# Altium PCB sathira.PcbDoc
Units mm, origin at the board's own origin, x right, y up, seen from the top; angles counter-clockwise.
Board outline 91.31 x 78.36 mm, 2 copper layers (Top Layer, Bottom Layer); 16 components, 19 nets, 55 pads, 0 vias.
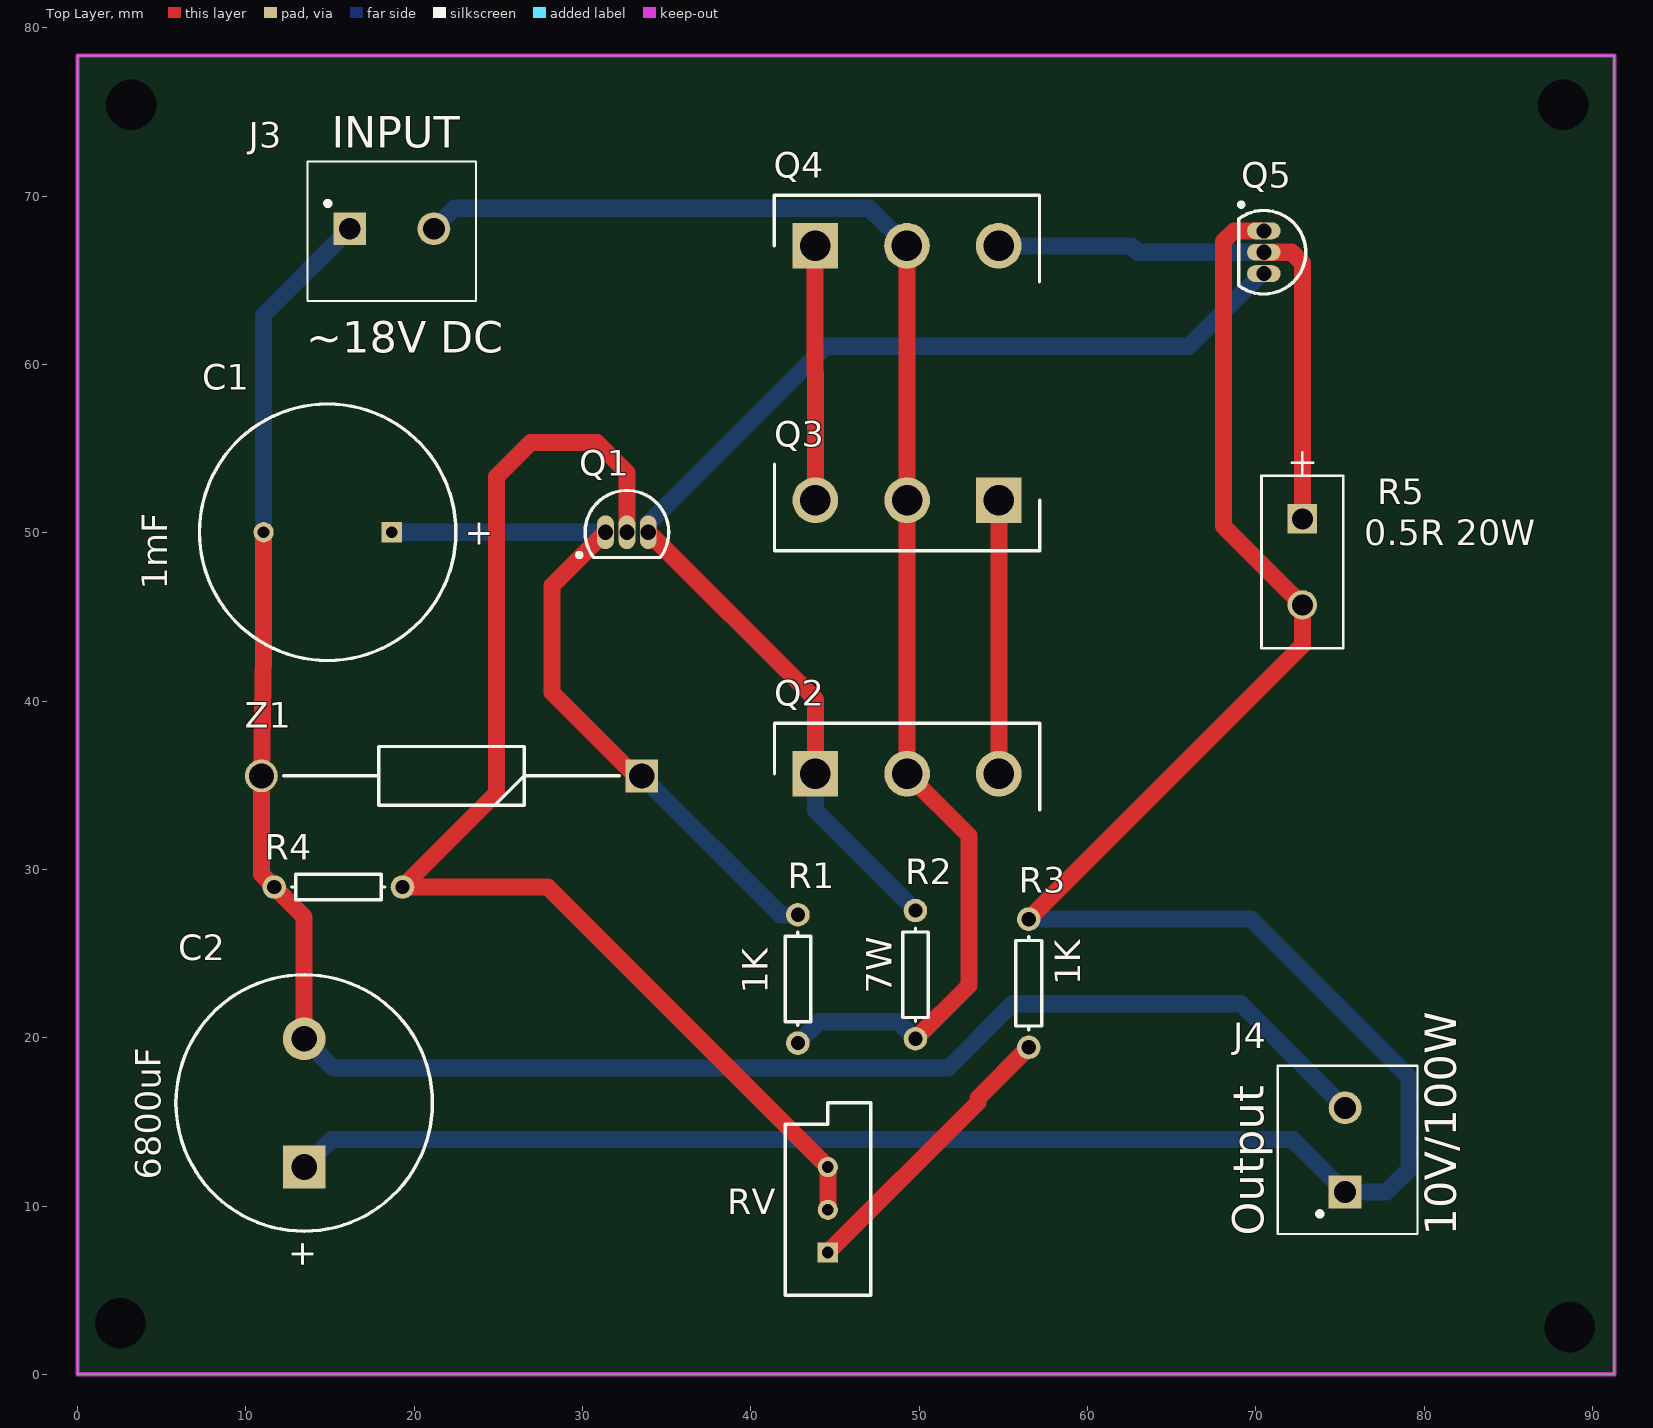
[diagram p0: Top Layer view]
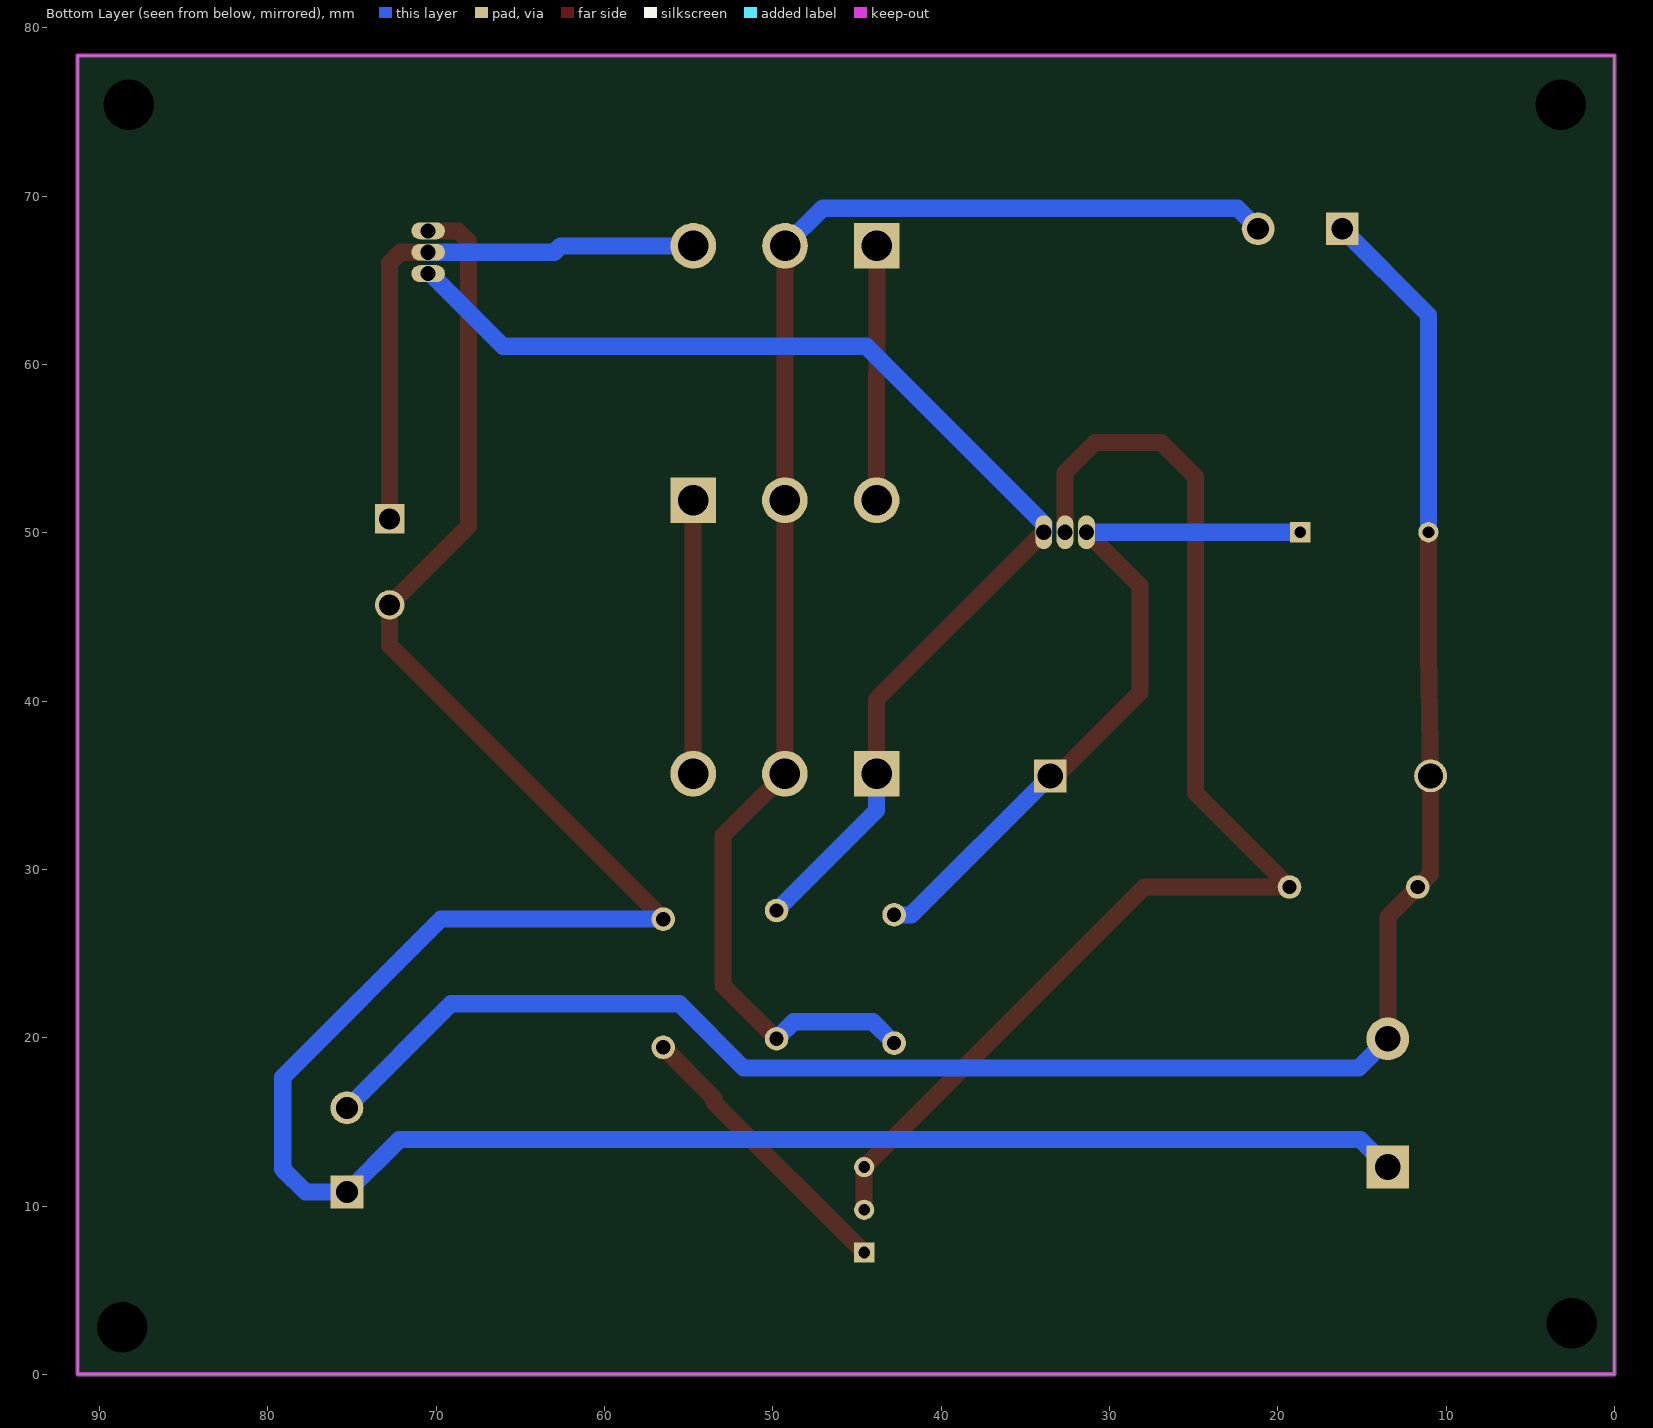
[diagram p1: Bottom Layer view, seen from below]

## Layer stack, top to bottom
Top Solder: solder mask 0.0102, Solder Resist, Dk 3.5
Top Layer: signal copper 0.0356
Dielectric 1: dielectric 0.32, FR-4, Dk 4.8
Bottom Layer: signal copper 0.0356
Bottom Solder: solder mask 0.0102, Solder Resist, Dk 3.5

## Board outline
0,0 91.313,0 91.313,78.359 0,78.359

## Design rules (kind name [scope] priority, off if disabled: settings)
Clearance [All] p1: gap=0.254 ignorepadtopadclearanceinfootprint=TRUE except(0.635: Fill-Fill Fill-Poly Fill-Region Poly-Poly Poly-Region Region-Region)
PolygonConnect [All] p1: connectstyle=Relief reliefconductorwidth=0.254 reliefentries=4 polygonreliefangle="90 Angle" airgapwidth=0.254
RoutingVias [All] p1: holewidth=0.711 width=1.27 viastyle="Through Hole" minholewidth=0.711 minwidth=1.27 maxholewidth=0.711 maxwidth=1.27
SolderMaskExpansion [All] p1: expansion=0.102
Width [All] p1: maxlimit=1.524 minlimit=0.762 preferedwidth=1.016
30 further rules are at their usual default settings.

## Classes and differential pairs
component class Sheet1new: C1 C2 J3 J4 Q1 Q2 Q3 Q4 R1 R2 R3 R4 R5 RV Z1

## Components (designator, comment, footprint, x,y, rotation, side; value= is the part's Value field where it differs from the comment)
C1 "Cap Pol1" RB7.6-15 14.859,50.038 r0 top value=100pF
C2 "Cap Pol1" RB7.6-15 13.462,16.129 r270 top value=100pF
J3 "1935161" *PHOENIX_1935161 18.669,68.072 r0 top
J4 "1935161" *PHOENIX_1935161 75.311,13.335 r90 top
Q1 "2N3904" TO-92A 32.639,50.038 r270 top
Q2 "TIP3055" TO545P515X1560X2445-3P 43.837,35.687 r0 top
Q3 "TIP3055" TO545P515X1560X2445-3P 54.737,51.943 r180 top
Q4 "TIP3055" TO545P515X1560X2445-3P 43.826,67.056 r0 top
Q5 "2N3904" TO-92A 70.485,66.675 r180 top
R1 "Res1" AXIAL-0.3 42.799,23.495 r270 top value=100
R2 "Res1" AXIAL-0.3 49.784,23.749 r270 top value=1K
R3 "Res1" AXIAL-0.3 56.515,23.241 r90 top value=1K
R4 "Res1" AXIAL-0.3 15.494,28.956 r0 top value=1K
R5 "TK20PR050JE" RES_TK 72.771,45.72 r270 top value=0.5
RV "RPot" VR5 44.577,9.779 r90 top value=1K
Z1 "1N5338BG" DIOAD2260W109L864D349 33.522,35.56 r180 top

## Footprints (in the part's own frame and the unit in brackets; to place one, negate y for a bottom-side part, rotate by r counter-clockwise, add the part's x,y. Pads: shape width x height; smd on the part's side, far side on the other; paste and mask are expansions set on the pad)
*PHOENIX_1935161 [mm]
  rect 1.95x1.95 hole 1.3: 1(-2.5,0)
  round 1.95 hole 1.3: 2(2.5,0)
  silkscreen extent -5,-4.3 5,4
AXIAL-0.3 [mm] "Axial Device, Thru-Hole; 2 Leads; 0.3 in Pin Spacing"
  round 1.4 hole 0.85: 1(-3.81,0) 2(3.81,0)
  silkscreen extent -2.77,-0.76 2.77,0.76
DIOAD2260W109L864D349 [mm]
  rect 1.95x1.95 hole 1.5: 1(0,0)
  round 1.95 hole 1.5: 2(22.6,0)
  silkscreen extent 1.33,-1.74 21.27,1.74, body extent -0.54,-1.84 23.14,1.84, height 3.68
RB7.6-15 [mm] "Polarized Capacitor (Radial); 2 Leads"
  rect 1.2x1.2 hole 0.7: 1(3.81,0)
  round 1.2 hole 0.7: 2(-3.81,0)
  silkscreen extent -7.62,-7.62 7.62,7.62
RES_TK [mil]
  rect 69x69 hole 49 mask-1000: 1(-201,0)
  round 69 hole 49 mask-1000: 2(0,0)
  silkscreen extent -358,-96 102,96
TO545P515X1560X2445-3P [mm]
  rect 2.715x2.715 hole 1.81: 1(0,0)
  round 2.715 hole 1.81: 2(5.45,0) 3(10.9,0)
  silkscreen extent -2.43,-2.15 13.33,3, body extent -2.35,-2.15 13.25,3, height 24
TO-92A [mm] "TO, Flat Index; 3 In-Line, Axial Leads; Body Dia. 4.5mm; Leads 0.51 x 0.48 mm (max)"
  oval 2x1 hole 0.9: 1(0,-1.27) 2(0,0) 3(0,1.27)
  silkscreen extent -2.48,-2.95 1.5,2.48, body extent -2.48,-2.5 1.5,2.5, height 6.86
VR5 [mm] "Thru-Hole; 3 Leads"
  rect 1.2x1.2 hole 0.7: 1(-2.54,0)
  round 1.2 hole 0.7: 2(0,0) 3(2.54,0)
  silkscreen extent -5.08,-2.54 6.35,2.54

## Part data
C1 C2: "Polarized Capacitor (Radial)", LatestRevisionDate=17-Jul-2002, LatestRevisionNote="Re-released for DXP Platform.", PackageDescription="Polarized Capacitor (Radial); 2 Leads", PackageReference=RB7.6-15, Published=8-Jun-2000, Publisher="Altium Limited"
J3 J4: "Conn Terminal Blocks 2 POS 5mm Solder ST Thru-Hole 16A", Package=None, Availability=Unavailable, MF="Phoenix Contact", MP=1935161, Price=None, SnapEDA_Link=https://www.snapeda.com/parts/1935161/Phoenix%20Contact/view-part/?ref=snap
Q1 Q5: "NPN General Purpose Amplifier", ComponentLink1Description="Manufacturer Link", ComponentLink1URL=http://www.fairchildsemi.com/, ComponentLink2Description=Datasheet, ComponentLink2URL=http://www.fairchildsemi.com/ds/2N%2F2N3904.pdf, DatasheetVersion=1997, LatestRevisionDate=15-Jan-2003, LatestRevisionNote="PCB Footprint 'BCY-W3/D4.7' replaced", PackageDescription="TO, Flat Index; 3 In-Line, Axial Leads; Body Dia. 4.5mm; Leads 0.51 x 0.48 mm (max)", PackageReference=TO-92A, PackageVersion=Sep-1998, Published=8-Jun-2000, Publisher="Altium Limited"
Q2 Q3 Q4: "Transistor BJT NPN", Manufacturer_Name=STMicroelectronics, Mouser Part Number=511-TIP3055, RS Part Number=1686168, Allied_Number=70014122, Allied Price/Stock=http://www.alliedelec.com/stmicroelectronics-tip3055/70014122/, Datasheet Link=http://www.st.com/web/en/resource/technical/document/datasheet/CD00000918.pdf, Height=5.15mm, Manufacturer_Part_Number=TIP3055, Mouser Price/Stock=https://www.mouser.com/Search/Refine.aspx?Keyword=511-TIP3055, RS Price/Stock=http://uk.rs-online.com/web/p/products/1686168
R1 R2 R3 R4: "Resistor", LatestRevisionDate=17-Jul-2002, LatestRevisionNote="Re-released for DXP Platform.", PackageDescription="Axial Device, Thru-Hole; 2 Leads; 0.3 in Pin Spacing", PackageReference=AXIAL-0.3, Published=8-Jun-2000, Publisher="Altium Limited"
RV: "Potentiometer", LatestRevisionDate=17-Jul-2002, LatestRevisionNote="Re-released for DXP Platform.", PackageDescription="Variable Resistor, Thru-Hole; 3 Leads", PackageReference=VR5, Published=8-Jun-2000, Publisher="Altium Limited", Set Position=0.5, Sim Note="Enter the Resistance value and the set point into parameter fields."
Z1: "Zener Diode", Manufacturer_Name="ON Semiconductor", Mouser Part Number=863-1N5338BG, RS Part Number=0463274P, Allied_Number=70099695, Allied Price/Stock=http://www.alliedelec.com/on-semiconductor-1n5338bg/70099695/, Datasheet Link=http://docs-emea.rs-online.com/webdocs/1385/0900766b813857e1.pdf, Manufacturer_Part_Number=1N5338BG, Mouser Price/Stock=https://www.mouser.com/Search/Refine.aspx?Keyword=863-1N5338BG, RS Price/Stock=http://uk.rs-online.com/web/p/products/0463274P
R5: Built_By=EMA_UL_Team, C="Copyright (C) 2015 Accelerated Designs. All rights reserved", Manufacturer_Part_Number=TK20PR050JE, Vendor=Ohmite

## Free pads (board coordinates)
  round 1.524 hole 3: 2(3.175,75.438) 3(88.265,75.438) 4(88.646,2.794) 5(2.54,3.048)
  round 2.54 hole 1.524: 6(13.462,19.939)
  rect 2.54x2.54 hole 1.524: 7(13.462,12.319)
  round 1.524 hole 0.762: 8(43.837,52.197) 9(49.287,51.943) 10(54.737,51.689) 11(54.737,35.687) 12(49.287,35.687) 13(43.837,35.687) 15(49.276,67.056) 16(43.826,66.802) 17(33.522,35.56) 18(10.922,35.56)
  round 1.524 hole 1.5: 14(54.726,67.056)

## Nets (pads, with @x,y where several pads share a name; then routed paths per layer and width w, separated by ;. In a path a pad name is that pad's centre, name@x,y a point inside that pad or via, vN(x,y) a via of type N, cw(c..) or ccw(c..) an arc to the next point about the centre after c; other vN are vias at no path point)
NetC1_1: C1.1 pad.17 Q1.1 R1.1 Z1.1 | length 43.6
  Top Layer w1.016: Q1.1 28.194,46.863 28.194,40.513 33.147,35.56 pad.17
  Bottom Layer w1.016: C1.1 Q1.1 ; pad.17 41.777,27.305 R1.1
NetC1_2: C1.2 C2.2 J3.1 J4.2 pad.6 pad.18 R4.1 Z1.2 | length 118
  Top Layer w1.016: C1.2 11.049,42.926 pad.18 10.922,29.718 R4.1 13.462,27.178 pad.6
  Bottom Layer w1.016: C1.2 11.049,62.952 J3.1 ; pad.6 15.189,18.212 51.74,18.212 55.55,22.022 69.124,22.022 J4.2
NetC2_1: C2.1 J4.1 pad.7 Q5.1 R3.2 R5.2 | length 151.8
  Top Layer w1.016: R3.2 72.771,43.307 R5.2 68.076,50.415 68.076,67.31 68.711,67.945 Q5.1
  Bottom Layer w1.016: pad.7 15.088,13.945 72.201,13.945 J4.1 77.764,10.835 79.121,12.192 79.121,17.653 69.723,27.051 R3.2
NetC7_1: 
NetC7_2: 
NetC8_1: 
NetC8_2: 
NetD13_1: 
NetD13_2: 
NetD15_2: 
NetD17_1: 
NetD19_1: 
NetJ3_2: J3.2 pad.9 pad.12 pad.15 Q2.2 Q3.2 Q4.2 R1.2 R2.2 | length 87.4
  Top Layer w1.016: pad.15 49.276,59.498 49.287,59.487 pad.9 49.287,43.79 pad.12 52.959,32.015 52.959,23.114 R2.2
  Bottom Layer w1.016: J3.2 22.388,69.291 47.041,69.291 pad.15 ; R1.2 44.069,20.955 48.768,20.955 R2.2
NetQ1_2: Q1.2 R4.2 RV.2 RV.3 | length 74.3
  Top Layer w1.016: Q1.2 32.639,53.594 30.861,55.372 26.924,55.372 24.892,53.34 24.892,34.544 R4.2 27.94,28.956 RV.3 RV.2
NetQ1_3: pad.13 Q1.3 Q2.1 Q5.3 R2.1 | length 72.3
  Top Layer w1.016: Q1.3 43.837,40.11 pad.13
  Bottom Layer w1.016: Q1.3 33.909,50.546 44.45,61.087 66.04,61.087 70.358,65.405 Q5.3 ; pad.13 43.837,33.506 R2.1
NetQ2_3: pad.10 pad.11 Q2.3 Q3.1 | length 16.3
  Top Layer w1.016: pad.11 pad.10 Q3.1
NetQ3_3: pad.8 pad.16 Q3.3 Q4.1 | length 15.1
  Top Layer w1.016: Q4.1 pad.16 43.826,59.498 43.837,59.487 pad.8 Q3.3
NetQ4_3: pad.14 Q4.3 Q5.2 R5.1 | length 33.7
  Top Layer w1.016: Q5.2 72.136,66.675 72.771,66.04 R5.1
  Bottom Layer w1.016: pad.14 62.611,67.056 62.992,66.675 Q5.2
NetR3_1: R3.1 RV.1 | length 17.1
  Top Layer w1.016: RV.1 53.492,16.154 53.492,16.408 R3.1

## Keep-outs
Keep-Out Layer:
  lines w0.254: 0,0 91.313,0 91.313,0.254 91.313,78.359 0,78.359 0,0

## Silkscreen, mask and mechanical layers (free items; w line width, h text height)
Top Overlay:
  text "0.5R 20W" at 76.454,49.276 h1.52
  text "1mF" at 5.334,46.609 h1.52 r90
  text "1K" at 59.563,23.114 h1.52 r90
  text "1K" at 41.021,22.606 h1.52 r90
  text "7W" at 48.387,22.606 h1.52 r90
  text "6800uF" at 4.953,11.557 h1.52 r90

## Text inside footprints (layer, text, board x,y; h text height)
C1: Top Overlay "+" at 22.991,49.301 h1.5
C2: Top Overlay "+" at 12.725,7.997 h1.5 r270
J3: Top Overlay "~18V DC" at 13.589,60.706 h1.88; Top Overlay "INPUT" at 15.113,72.898 h1.88
J4: Top Overlay "Output" at 70.474,8.248 h1.88 r90; Top Overlay "10V/100W" at 81.927,8.242 h1.88 r90